# Altium PCB Serializer_System2.PcbDoc
Units mil, origin at the board's own origin, x right, y up, seen from the top; angles counter-clockwise.
Board outline 669.29 x 728.35 mil, 4 copper layers (Top Layer, MidLayer1, MidLayer2, Bottom Layer), stack 30.2 mil thick; 64 components, 46 nets, 233 pads, 76 vias.
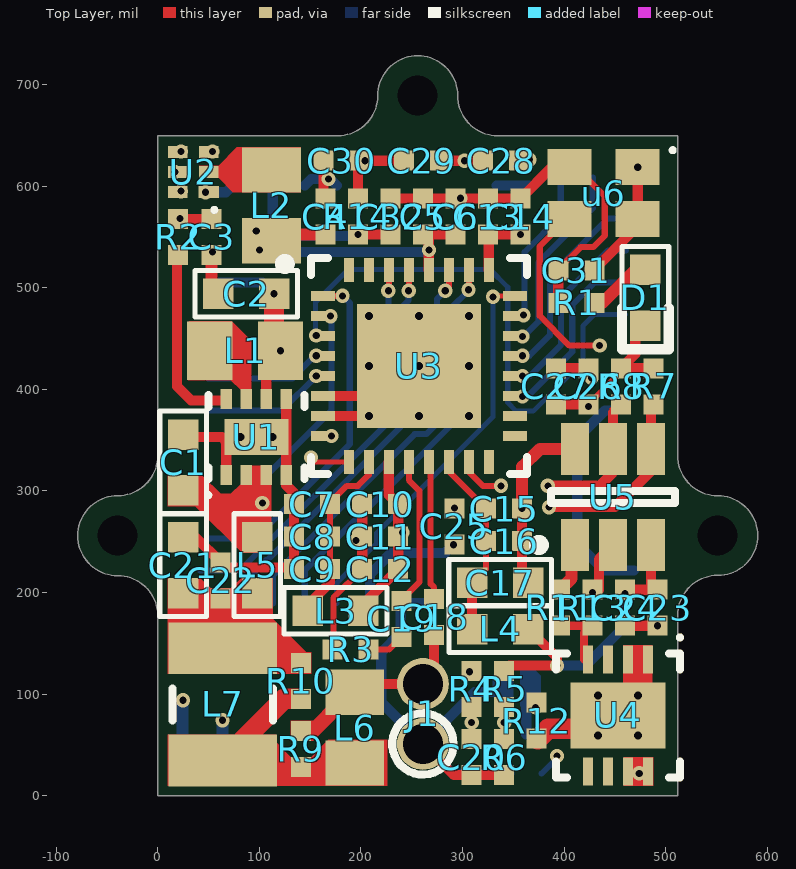
[diagram p0: Top Layer view]
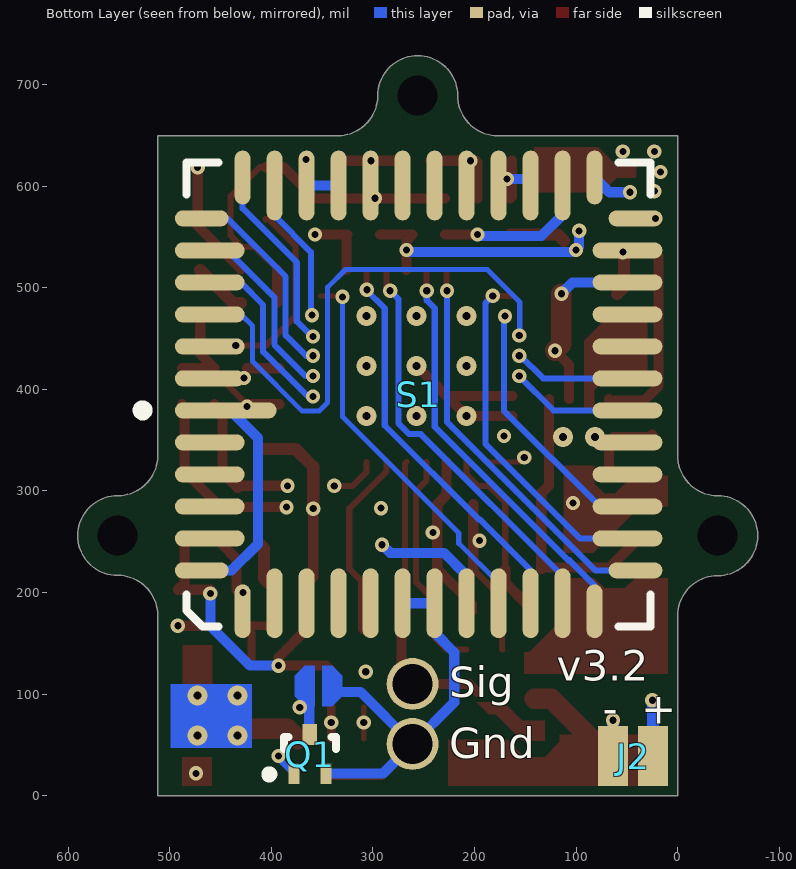
[diagram p1: Bottom Layer view, seen from below]
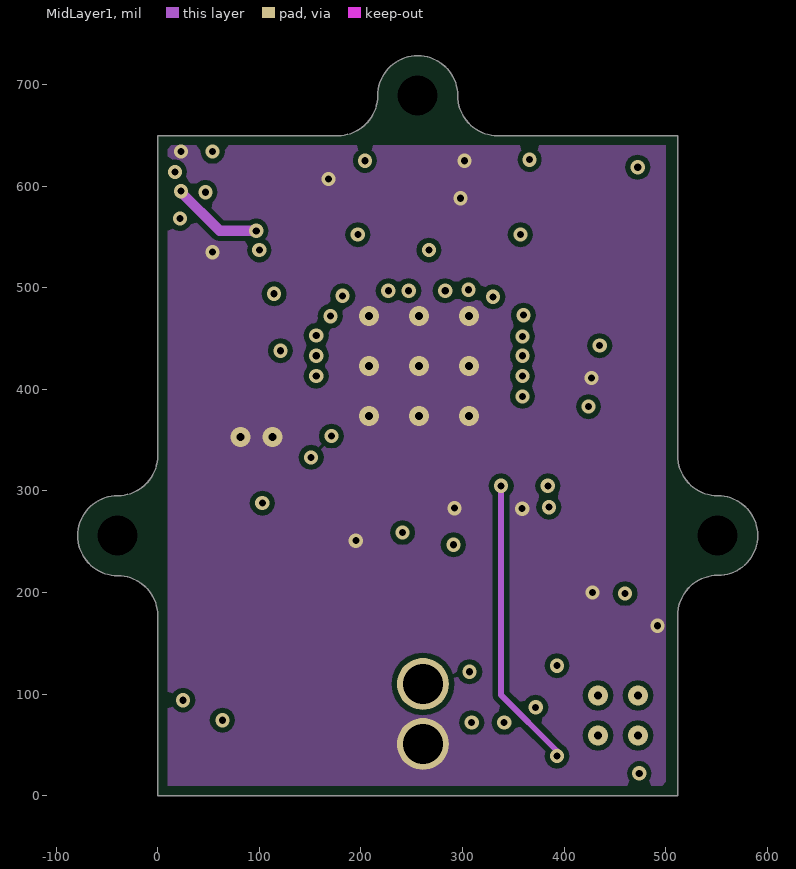
[diagram p2: MidLayer1]
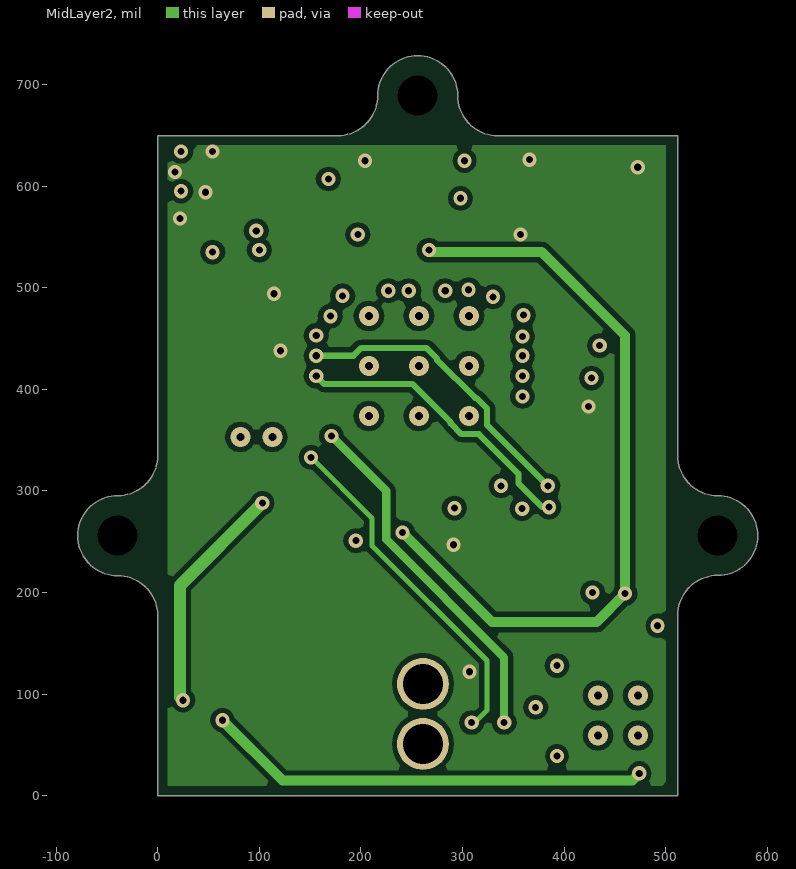
[diagram p3: MidLayer2]

## Layer stack, top to bottom
Top Solder: solder mask 0.4, Solder Resist, Dk 3.5
Top Layer: signal copper 1.4
Dielectric1: core 6, FR-4 High TG, Dk 4.8
MidLayer1: signal copper 1.4
Dielectric2: prepreg 12.6, FR-4 High TG, Dk 4.8
MidLayer2: signal copper 1.4
Dielectric3: core 6, FR-4 High TG, Dk 4.8
Bottom Layer: signal copper 1.4
Bottom Solder: solder mask 0.4, Solder Resist, Dk 3.5

## Board outline
0,0 511.81,0 511.81,177.17 511.81,177.51 cw(c551.18,177.51) 551.18,216.87 551.52,216.87 ccw(c551.52,255.91) 590.55,255.91 ccw(c551.18,255.91) 551.18,295.28 cw(c551.18,334.65) 511.81,334.65 511.81,649.61 334.65,649.61 cw(c334.65,688.98) 295.28,688.98 ccw(c255.91,688.98) 255.91,728.35 ccw(c255.91,688.98) 216.54,688.98 cw(c177.17,688.98) 177.17,649.61 0,649.61 cw(c-39.37,334.65) -39.37,295.28 ccw(c-39.37,255.91) -78.74,255.91 ccw(c-39.37,255.91) -39.37,216.54 cw(c-39.37,177.17) 0,177.17

## Design rules (kind name [scope] priority, off if disabled: settings)
Clearance [All] p1: gap=5
PolygonConnect [All] p1: connectstyle=Direct reliefconductorwidth=10 reliefentries=4 polygonreliefangle="90 Angle" airgapwidth=10
RoutingVias [All] p1: holewidth=10 width=22 viastyle="Through Hole" minholewidth=7 minwidth=14 maxholewidth=28 maxwidth=50
SolderMaskExpansion [All] p1: expansion=1
UnpouredPolygon [All] p1: allowunpoured=FALSE
Width [All] p1: maxlimit=100 minlimit=5 preferedwidth=10 minimp=50.000000 maximp=50.000000 favimp=50.000000
29 further rules are at their usual default settings.

## Classes and differential pairs
component class Connector: J2
net class DIN[0..11]: DIN0 DIN1 DIN2 DIN3 DIN4 DIN5 DIN6 DIN7 DIN8 DIN9 DIN10 DIN11
component class Serializer: C5 C6 C7 C8 C9 C10 C11 C12 C13 C14 C15 C16 C17 C18 C19 C20 L3 L4 R3 R4 R5 R6 R7 R8 U3
component class Power: C1 C2 C3 C4 D1 L1 L2 R1 R2 U1 U2
component class "LED Driver": C23 C24 Q1 R11 R12 R13 U4 U5
component class "Coax Port": C21 C22 J1 L5 L6 L7 R9 R10
component class "CMOS Sensor": C23 C24 C25 C26 C27 C30 R14 S1 u6

## Components (designator, comment, footprint, x,y, rotation, side; value= is the part's Value field where it differs from the comment)
C1 "10uF" "SMD Capacitor 0603" 25,328 r90 top
C2 "22uF" "SMD Capacitor 0603" 87,494 r180 top
C3 "2.2uF" "SMD CAP 0402" 53,550 r270 top
C4 "4.7uF" "SMD CAP 0402" 165,570 r90 top
C5 "0.1uF" "SMD CAP 0402" 261,570 r90 top
C6 "0.01uF" "SMD CAP 0402" 293,570 r90 top
C7 "0.1uF" "SMD CAP 0402" 152,287 r180 top
C8 "0.01uF" "SMD CAP 0402" 152,255 r180 top
C9 "4.7uF" "SMD CAP 0402" 152,223 r180 top
C10 "0.1uF" "SMD CAP 0402" 219,287 r180 top
C11 "0.01uF" "SMD CAP 0402" 219,255 r180 top
C12 "4.7uF" "SMD CAP 0402" 219,223 r180 top
C13 "0.1uF" "SMD CAP 0402" 325,570 r90 top
C14 "0.01uF" "SMD CAP 0402" 357,570 r90 top
C15 "0.1uF" "SMD CAP 0402" 340.98,282.54 r0 top
C16 "0.01uF" "SMD CAP 0402" 340.98,250.54 r0 top
C17 "22uF" "SMD Capacitor 0603" 336.98,209.54 r0 top
C18 "0.1uF" "SMD CAP 0402" 272,176 r270 top
C19 "0.047uF" "SMD CAP 0402" 240,174 r270 top
C20 "10uF" "SMD CAP 0402" 309,38 r270 top
C21 "4.7uF" "SMD Capacitor 0603" 25,227 r90 top
C22 ".1uF" "SMD CAP 0402" 62,212 r90 top
C23 "100nF" "SMD CAP 0402" 492,185 r270 top
C24 "1uF" "SMD CAP 0402" 460,185 r270 top
C25 "100nF" "SMD CAP 0402" 292,265 r90 top
C26 "100nF" "SMD CAP 0402" 424,403 r90 top
C27 "4.7uF" "SMD CAP 0402" 392,403 r90 top
C28 "100nF" "SMD CAP 0402" 338,625 r180 top
C29 "4.7uF" "SMD CAP 0402" 260,625 r0 top
C30 "100nF" "SMD CAP 0402" 181,625 r180 top
C31 "10nF" "SMD CAP 0402" 412,517 r180 top
C32 "100nF" "SMD CAP 0402" 229,570 r90 top
D1 "LED 0603" LED_0603 480,490 r90 top
J1 "Coax Connector" "Coax Direct Solder ThroughHoles" 261,110 r0 top
J2 "2 Pin Connector" "2pin smd pad for LED connector" 44,39 r0 bottom
L1 "Ferrite Bead" LQM21PN2R2MC0D 86,438 r0 top
L2 "Ferrite Bead" LQM21PN2R2MC0D 112,581 r270 top
L3 "Ferrite Bead" BLM18KG601SN1D 175,182 r180 top
L4 "Ferrite Bead" BLM18KG601SN1D 337,164 r0 top
L5 "Ferrite Bead" BLM18KG601SN1D 98,227 r90 top
L6 "Ferrite Bead" CIG21L4R7MNE 194,67 r270 top
L7 "Ferrite Bead" CBC3225T101MR 64,90 r90 top
Q1 "N Channel MOSFET" NTK3134N 362,41 r90 bottom
R1 "500" "SMD RES 0402" 412,485 r180 top
R2 "100k" "SMD RES 0402" 20,550 r90 top
R3 "49.9" "SMD RES 0402" 190,144 r180 top
R4 "10k" "SMD RES 0402" 309,105 r270 top
R5 "10k" "SMD RES 0402" 341,105 r90 top
R6 "100k" "SMD RES 0402" 341,38 r90 top
R7 "3.3k" "SMD RES 0402" 488,403 r90 top
R8 "3.3k" "SMD RES 0402" 456,403 r90 top
R9 "1k" "SMD RES 0402" 141,46 r270 top
R10 "1k" "SMD RES 0402" 141,113 r90 top
R11 "1k" "SMD RES 0402" 396,185 r270 top
R12 "10" "SMD RES 0402" 373,74 r90 top
R13 "1.25k" "SMD RES 0402" 428,185 r270 top
R14 "10k" "SMD RES 0402" 197,570 r90 top
S1 "CMOS Sensor MT9V032" "CMOS Sensor MT9V032_HD" 255,395 r90 bottom
U1 "TPS62172DSGT" DSG8-1600X900TP 97,353 r90 top
U2 "TPS62231DRYT" DRY6 35,614 r180 top
U3 "DS90UR913A" "WQFN32 for DS90UB913A" 257,423 r0 top
U4 "LT3092EDD#PBF" LT-DD-8_V 453,79 r270 top
U5 "DAC5571IDBVR" TI-DBV6_M 448,294 r90 top
u6 "OSC_26MHz_EPSON" "OSC SG_211SCE 26MHz" 439,593 r270 top

## Footprints (in the part's own frame and the unit in brackets; to place one, negate y for a bottom-side part, rotate by r counter-clockwise, add the part's x,y. Pads: shape width x height; smd on the part's side, far side on the other; paste and mask are expansions set on the pad)
"2pin smd pad for LED connector" [mm] "1mm pitch"
  rect 0.75x1.5 smd mask+0: 1(-0.5,0) 2(0.5,0)
BLM18KG601SN1D [mil] "0603 Ferrite Chip 600OHM 1.3A"
  rect 30x30 smd: 1(-27.5,0) 2(27.5,0)
  silkscreen extent -50,-23 50,23, body extent -32,-15 32,15, height 19
CBC3225T101MR [mm] "Chip Inductor, 2-Leads, Body 3.20x2.50mm, IPC Medium Density, 100uH, 340mA, 1.82OHM"
  rect 1.29x2.72 smd: 1(-1.405,0) 2(1.405,0)
  silkscreen extent -0.4,-1.26 0.4,1.26, body extent -1.7,-1.35 1.7,1.35, height 2.7
CIG21L4R7MNE [mm] "SMD 0805 4.7uH, 750mA"
  rect 1.13x1.47 smd: 1(-0.885,0) 2(0.885,0)
  body extent -1.1,-0.72 1.1,0.72, height 1.05
"CMOS Sensor MT9V032_HD" [mm] "LCC, 48-Pins, Body 11.43x11.43mmx2.50mm, Pitch 0.80mm, IPC High Density"
  oval 0.4x2.546 smd: 1(-0.4,4.823)
  oval 0.4x1.746 smd: 2(-1.2,5.223) 3(-2,5.223) 4(-2.8,5.223) 5(-3.6,5.223) 20(-3.6,-5.223) 21(-2.8,-5.223) 22(-2,-5.223) 23(-1.2,-5.223) 24(-0.4,-5.223) 25(0.4,-5.223) 26(1.2,-5.223) 27(2,-5.223) 28(2.8,-5.223) 29(3.6,-5.223) 44(3.6,5.223) 45(2.8,5.223) 46(2,5.223) 47(1.2,5.223) 48(0.4,5.223)
  oval 0.4x1.346 smd: 6(-4.4,5.423) 19(-4.4,-5.423) 30(4.4,-5.423) 43(4.4,5.423)
  oval 1.346x0.4 smd: 7(-5.423,4.4) 18(-5.423,-4.4) 31(5.423,-4.4) 42(5.423,4.4)
  oval 1.746x0.4 smd: 8(-5.223,3.6) 9(-5.223,2.8) 10(-5.223,2) 11(-5.223,1.2) 12(-5.223,0.4) 13(-5.223,-0.4) 14(-5.223,-1.2) 15(-5.223,-2) 16(-5.223,-2.8) 17(-5.223,-3.6) 32(5.223,-3.6) 33(5.223,-2.8) 34(5.223,-2) 35(5.223,-1.2) 36(5.223,-0.4) 37(5.223,0.4) 38(5.223,1.2) 39(5.223,2) 40(5.223,2.8) 41(5.223,3.6)
  silkscreen extent -5.8,-5.8 5.8,7.02, body extent -5.71,-5.71 5.71,5.71, height 2.5
"Coax Direct Solder ThroughHoles" [mm]
  round 1.3 hole 1 mask+0: 0(0,0) 1(0,-1.5)
DRY6 [mm] "PSON, 6-Leads, Body 1x1.45mm, Pitch 0.5mm, TI Recommended"
  rect 0.52x0.3 smd paste+0 mask+0.05: 1(-0.385,0.5)
  rect 0.49x0.3 smd paste+0 mask+0.05: 2(-0.385,0) 3(-0.385,-0.5) 4(0.385,-0.5) 5(0.385,0) 6(0.385,0.5)
  silkscreen extent -0.58,0.9 -0.48,1, body extent -0.53,-0.75 0.53,0.75, height 0.6
DSG8-1600X900TP [mm] "SON, 8-Leads, Body 2x2mm, Pitch 0.5mm, Thermal Pad 1.6x0.9mm, TI Recommended"
  rect 0.5x0.28 smd paste-0.14 mask+0.07: 1(-0.95,0.75) 2(-0.95,0.25) 3(-0.95,-0.25) 4(-0.95,-0.75) 5(0.95,-0.75) 6(0.95,-0.25) 7(0.95,0.25) 8(0.95,0.75)
  rect 0.9x1.6 smd paste-0.45 mask+0.07: 9(0,0)
  silkscreen extent -1.5,-1.2 1.05,1.25, body extent -1.05,-1.05 1.05,1.05, height 0.8
LED_0603 [mil] "LTST-C190KGKT"
  rect 30x30 smd: A(-27.5,0) C(27.5,0)
  silkscreen extent -50,-23 50,23, body extent -32,-15 32,15, height 20
LQM21PN2R2MC0D [mm] "SMD Fixed Ind. 2.2uH, 600mA, 0805"
  rect 1.13x1.47 smd: 1(-0.885,0) 2(0.885,0)
  body extent -1.1,-0.72 1.1,0.72, height 1.05
LT-DD-8_V [mm] "SON, 8-Leads, Body 3x3mm, Pitch 0.5mm, Thermal Pad 1.65x2.38 mm, IPC Low Density"
  rect 0.7x0.25 smd mask+0.102: 1(-1.4,0.75) 2(-1.4,0.25) 3(-1.4,-0.25) 4(-1.4,-0.75) 5(1.4,-0.75) 6(1.4,-0.25) 7(1.4,0.25) 8(1.4,0.75)
  rect 1.65x2.38 smd mask+0.102: 9(0,0)
  silkscreen extent -2,-1.55 1.55,1.6, body extent -1.5,-1.5 1.5,1.5, height 0.8
NTK3134N [mm] "SOT723, 3-Leads, Body 1.20x1.20mm, Pitch 0.40mm, IPC Medium Density"
  rect 0.52x0.36 smd: D(0.49,0)
  rect 0.52x0.27 smd: G(-0.49,0.4) S(-0.49,-0.4)
  silkscreen extent -0.61,-0.65 0.43,1.12, body extent -0.42,-0.63 0.43,0.63, height 0.55
"OSC SG_211SCE 26MHz" [mm] "DFN, 4-Leads, Body 2.50x2.00mm, Pitch 1.70mm, IPC Medium Density"
  rect 0.9x1.1 smd: 1(-0.65,0.85) 2(-0.65,-0.85) 3(0.65,-0.85) 4(0.65,0.85)
  silkscreen extent -1.12,1.68 -1.03,1.77, body extent -1.07,-1.33 1.08,1.32, height 0.8
"SMD CAP 0402" [mm] "Chip Capacitor, 2-Leads, Body 1.00x0.50mm, IPC Medium Density"
  rect 0.5x0.5 smd: 0(-0.45,0) 1(0.45,0)
  body extent -0.53,-0.28 0.53,0.28, height 0.5
"SMD Capacitor 0603" [mil]
  rect 30x30 smd: 0(-27.5,0) 1(27.5,0)
  silkscreen extent -50,-23 50,23, body extent -32,-15 32,15, height 19
"SMD RES 0402" [mm]
  rect 0.5x0.5 smd: 0(-0.45,0) 1(0.45,0)
  body extent -0.53,-0.28 0.53,0.28, height 0.5
TI-DBV6_M [mm] "SOT23, 6-Leads, Body 2.9x1.6mm, Pitch 0.95mm, IPC Low Density"
  rect 1.3x0.7 smd: 1(-1.2,0.95) 2(-1.2,0) 3(-1.2,-0.95) 4(1.2,-0.95) 5(1.2,0) 6(1.2,0.95)
  silkscreen extent -1.32,-1.55 0.15,1.97, body extent -0.87,-1.52 0.87,1.53, height 1.45
"WQFN32 for DS90UB913A" [mm] "QFN, 32-Leads, Body 5.00x5.00mm, Pitch 0.50mm, Thermal Pad 3.10x3.10mm, IPC Medium Density"
  rect 0.6x0.25 smd mask+0: 1(-2.4,1.75) 2(-2.4,1.25) 3(-2.4,0.75) 4(-2.4,0.25) 5(-2.4,-0.25) 6(-2.4,-0.75) 7(-2.4,-1.25) 8(-2.4,-1.75) 17(2.4,-1.75) 18(2.4,-1.25) 19(2.4,-0.75) 20(2.4,-0.25) 21(2.4,0.25) 22(2.4,0.75) 23(2.4,1.25) 24(2.4,1.75)
  rect 0.25x0.6 smd mask+0: 9(-1.75,-2.4) 10(-1.25,-2.4) 11(-0.75,-2.4) 12(-0.25,-2.4) 13(0.25,-2.4) 14(0.75,-2.4) 15(1.25,-2.4) 16(1.75,-2.4) 25(1.75,2.4) 26(1.25,2.4) 27(0.75,2.4) 28(0.25,2.4) 29(-0.25,2.4) 30(-0.75,2.4) 31(-1.25,2.4) 32(-1.75,2.4)
  rect 3.1x3.1 smd paste-4: 33(0,0)
  silkscreen extent -3.47,-2.7 2.7,2.7, body extent -2.55,-2.55 2.55,2.55, height 0.8

## Part data
C1 C2 C3 C4 C5 C6 C7 C8 C9 C10 C11 C12 C13 C14 C15 C16 C17 C18 C19 C20 C21 C22 C23 C24 C25 C26 C27 C28 C29 C30 C31 C32: library part Capacitor
D1: "LTST_C195TBJRKT"
R1 R2 R3 R4 R5 R6 R7 R8 R9 R10 R11 R12 R13 R14: library part Resistor
U1: library part TPS62170DSGT, "Buck Step Down Regulator with 3 to 17 V Input and 0.9 to 6 V Output, -40 to 85 degC, 8-Pin WSON (DSG), Green (RoHS & no Sb/Br)"
U2: "Buck Step Down Regulator with 2.05 to 6 V Input and 1.8 V Output, -40 to 85 degC, 6-Pin SON (DRY), Green (RoHS & no Sb/Br)"
U3: "DS90UR913ASERIALIZER"
U4: "200 mA Two-Terminal Programmable Current Source, 0.3 mA Isupply, 8-pin SON (DD-8), -40 to 125 degC, Pb-Free"
U5: "Low-Power, 8-Bit DAC with High-Speed I2C Input, -40 to 105 degC, 6-pin SOT23 (DBV6), Green (RoHS & no Sb/Br)"

## Free pads (board coordinates)
  round 0 hole 39.37 unplated: NA(-39.37,255.91) NA(255.91,688.98) NA(551.18,255.91)

## Via types
v1: diameter 14, hole 7, Top Layer to Bottom Layer, tented both sides, 61 vias
v2: diameter 19.68, hole 7.87, Top Layer to Bottom Layer, tented both sides, 11 vias
v3: diameter 19.68, hole 7.87, Top Layer to Bottom Layer, 4 vias

## Nets (pads, with @x,y where several pads share a name; then routed paths per layer and width w, separated by ;. In a path a pad name is that pad's centre, name@x,y a point inside that pad or via, vN(x,y) a via of type N, cw(c..) or ccw(c..) an arc to the next point about the centre after c; other vN are vias at no path point)
DIN0: S1.45 U3.19 | length 175.1
  Bottom Layer w6: v1(359,393) 364,393 408,437 408,483 430.24,505.24 S1.45
DIN1: S1.44 U3.20 | length 180.2
  Bottom Layer w6: v1(359,413) 366,413 397,444 397,490.55 443.18,536.73 S1.44
DIN2: S1.43 U3.21 | length 199.4
  Bottom Layer w6: v1(359,433) 365.77,433 386,453.23 386,511.05 443.18,568.23 S1.43
DIN3: S1.42 U3.22 | length 185.9
  Bottom Layer w6: v1(359,452) 360.21,452 375,466.79 375,525 428.23,578.23 S1.42
DIN4: S1.41 U3.23 | length 143.4
  Bottom Layer w6: v1(360,473) 361,473 361,535.07 396.73,570.8 S1.41
DIN5: S1.15 U3.24 | length 387.2
  Top Layer w5: v1(330,491) 330.9,491.9 U3.24
  Bottom Layer w5: S1.15 176.26,209.26 215.5,248.5 215.5,258.5 330,373 v1(330,491)
DIN6: S1.16 U3.26 | length 395.7
  Top Layer w6: v1(306,498) 306.21,498.21 U3.26
  Bottom Layer w6: S1.16 144.76,221.98 194.79,272 196,272 288.37,364.37 288.37,479.6 306,497.23 v1(306,498)
DIN7: S1.17 U3.27 | length 407.8
  Top Layer w6: v1(283,497) 285.06,497 286.53,498.47 U3.27
  Bottom Layer w6: S1.17 113.27,216.27 252.94,355.94 264.39,355.94 275,366.55 275,489 v1(283,497)
DIN8: S1.18 U3.29 | length 405.1
  Top Layer w6: v1(247,497) 247.16,497.16 U3.29
  Bottom Layer w6: S1.18 81.77,206.82 106.69,231.74 107.74,231.74 239.16,363.16 239.16,479.6 247,487.45 v1(247,497)
DIN9: S1.19 U3.30 | length 395.9
  Top Layer w6: v1(227,497) 227.47,497.47 U3.30
  Bottom Layer w6: S1.19 81,221.77 227,367.77 v1(227,497)
DIN10: U3.31
DIN11: U3.32
GND: C1.1 C2.1 C3.1 C4.1 C5.1 C6.1 C7.1 C8.1 C9.1 C10.1 C11.1 C12.1 C13.1 C14.1 C15.1 C16.1 C17.1 C20.1 C21.1 C22.1 C23.1 C24.1 C25.1 C26.1 C27.1 C28.1 C29.1 C30.1 C31.1 C32.1 J1.1 Q1.S R1.1 R3.1 R6.0 R13.0 S1.7 S1.12 S1.13 S1.23 S1.29 S1.33 S1.34 S1.38 S1.48 U1.1 U1.4 U1.5 U1.9 U2.4 U3.6 U3.7 U3.33 U5.2 U5.6 u6.2 | length 2012.9
  Top Layer w6: R3.1 173,144.72 173,194.72 C12.1 ; C31.1@394.28,518 416.28,540 428.81,540 440,551.19 440,590 411.41,618.59 u6.2
  Top Layer w10: C21.1 37.22,254.5 C22.1 67.22,224.5 C9.1@134.28,224.5 ; C1.1 27.5,353 63,353 67.47,348.53 U1.1 ; U1.5 U1.4 126.53,305.47 134.28,297.72 C7.1 C8.1 C9.1@134.28,224.5 ; C9.1 C9.1@134.28,224.5 ; U3.7 v2(207.79,373.79) U3.33@227.47,393.47 ; U3.6 U3.33@227.47,393.47 ; C30.1 163.28,589.43 C4.1 ; C12.1 C11.1 C10.1 ; C32.1 C5.1 C6.1 C13.1 C14.1 387.87,618.59 u6.2 ; v2(257,423) U3.33@227.47,393.47 ; J1.1 291.66,20.28 C20.1 R6.0 ; C29.1@279.72,625 C28.1@324.28,625 ; v1(358.69,282.54) C16.1 358.69,215.33 C17.1 ; C27.1 C26.1 ; R1.1 C31.1@394.28,518 ; R13.0 434.38,202.72 434.38,233.13 U5.2 ; C24.1 v1(492,167.28)
  Top Layer w12: C3.1 53,500.5 C2.1 ; v1(358.69,282.54) 358.69,323.69 376.24,341.24 U5.6
  Bottom Layer w10: S1.33 151.13,607 v1(168,607) 169.89,607 S1.34 ; S1.12 S1.13 239.25,160.25 220,141 220,91.94 J1.1 ; 339,102 312.06,102 J1.1 ; Q1.S 290.24,21.71 J1.1
  Bottom Layer w12: v1@491.72,167 v1(492,167.28)
  other v1: 428,200 195,251 292,283 427,411 54,535 298,588 302,625 23,634
  other v2: 81.25,353 112.75,353 257,373.79 306.21,373.79 207.79,423 306.21,423 207.79,472.21 257,472.21 306.21,472.21
NetC7_0: C7.0 C8.0 C9.0 L3.2 U3.10 | length 177.9
  Top Layer w6: C9.0 C8.0 C7.0 169.72,288.72 186,305 197,305 207.79,315.79 U3.10
  Top Layer w10: L3.2 147.5,187.6 169.72,209.82 C9.0
NetC15_0: C15.0 C16.0 C17.0 L4.1 U3.14 | length 185.4
  Top Layer w6: U3.14 286.53,319.28 C15.0 C16.0 323.26,223.33 C17.0
  Top Layer w10: L4.1 C17.0
NetC18_0: C18.0 U3.13 | length 136.9
  Top Layer w6: U3.13 268.56,326.8 268.56,208.44 272,205 C18.0
NetC18_1: C18.1 J1.0 L6.1 R9.0 | length 120.1
  Top Layer w10: L6.1@197,102.15 204.85,110 J1.0 272,121 C18.1
NetC19_0: C19.0 U3.12 | length 148.4
  Top Layer w6: C19.0 240,192.72 257.56,210.27 257.56,300.16 247.16,310.56 U3.12
NetC19_1: C19.1 R3.0 | length 37.4
  Top Layer w6: R3.0 227.72,144 C19.1
NetC20_0: C20.0 R4.1 U3.9 | length 411.2
  Top Layer w5: v1(151,333) 155.49,328.51 U3.9 ; C20.0 v1(309,72) R4.1
  MidLayer2 w5: v1(151,333) 211,273 211,246 324,133 324,84 312,72 v1(309,72)
NetC21_0: C21.0 C22.0 L5.1 L7.2 R10.1
NetC32_0: C32.0 R14.0 S1.32 | length 153.7
  Top Layer w10: v1(197,552.28) C32.0
  Bottom Layer w10: S1.32 113.27,571.73 134,551 195.72,551 v1(197,552.28)
NetD1_C: D1.C R1.0 | length 53.7
  Top Layer w12: R1.0 437.5,485 D1.C@470,517.5
NetJ2_2: J2.2 U4.7 U4.8 | length 473.1
  MidLayer2 w10: v1(63.68,74.32) 123,15 467,15 v1(474,22)
  Bottom Layer w12: J2.2 v1(63.68,74.32)
NetL1_1: L1.1 U1.7
NetL2_1: L2.1 U2.2
NetL6_2: L6.2 L7.1 R9.1 R10.0 | length 102.1
  Top Layer w20: L7.1 124.6,95.28 R10.0
NetQ1_D: Q1.D R12.1 | length 51.4
  Bottom Layer w10: Q1.D@362.71,60.29 362.71,92 ; 362.71,100.29 362.71,92 ; v1(372,87) 367.71,87 362.71,92
NetQ1_G: Q1.G U3.15 | length 359.6
  Top Layer w6: U3.15 306.21,318.79 320,305 v1(338,305)
  MidLayer1 w6: v1(338,305) 338,99 393,44 v1(393,39)
  Bottom Layer w6: Q1.G 393,36.96 v1(393,39)
NetR2_0: R2.0 U1.8 | length 185.4
  Top Layer w10: R2.0 18.91,531.2 18.91,403.09 33,389 67.47,389 U1.8
NetR5_0: R5.0 R6.1 U3.8 | length 384
  Top Layer w8: R6.1 v1(341,72) R5.0
  MidLayer2 w8: v1(171,354) 225,300 225,252 341,136 v1(341,72)
NetR7_0: R7.0 S1.24 U3.5 U5.4 | length 591.4
  Top Layer w10: v1(385,284) 450,284 485.4,319.4 U5.4 485.4,382.68 R7.0
  MidLayer2 w6: v1(156,413) 163.84,405.16 250.86,405.16 288.37,367.65 288.37,366.4 298.82,355.94 316.06,355.94 355,317 355,307.45 378.45,284 v1(385,284)
  Bottom Layer w6: S1.24 122.25,379.25 v1(156,413)
NetR8_0: R8.0 S1.25 U3.4 U5.5 | length 555.2
  Top Layer w10: v1(384,305) 431,305 433,303 448,318 U5.5 448,377.28 R8.0
  MidLayer2 w6: v1(156,433) 192.55,433 200.4,440.84 264.39,440.84 274.84,430.39 274.84,429.14 312.35,391.63 313.6,391.63 324.06,381.18 324.06,364.94 v1(384,305)
  Bottom Layer w6: S1.25 132.53,410.75 154.79,433 v1(156,433)
NetR11_0: R11.0 U5.1 | length 50.1
  Top Layer w12: R11.0 407.16,213.87 407.16,243.32 U5.1
NetR11_1: R11.1 R13.1 U4.4 | length 70
  Top Layer w8: R11.1 R13.1 ccw(c428,158.76) 419.47,158.76 U4.4@419.47,134.12
NetR12_0: R12.0 U4.1 U4.2 U4.9 | length 94.2
  Top Layer w20: R12.0@374,55.72 384.28,66 426.63,66 v3(433.32,59.32) U4.9
  other v3: 472.69,59.32 433.32,98.68 472.69,98.68
NetS1_20: S1.20 U3.1 | length 346.5
  Top Layer w6: U3.1 181.9,491.9 v1(182,492)
  Bottom Layer w6: S1.20 96.27,253.27 189,346 189,485 v1(182,492)
NetS1_21: S1.21 U3.2 | length 254.1
  Bottom Layer w6: S1.21 76.76,284.76 171,379 171,471 v1(170,472)
NetS1_46: S1.46 U3.3 | length 535.8
  Bottom Layer w5: v1(156,453) 155.5,453.5 155.5,486.01 187.49,518 327,518 344.5,500.5 344.5,386.99 352.99,378.5 369.5,378.5 418.5,427.5 418.5,462.5 429.74,473.74 S1.46
NetU3_16: U3.16
NetU3_17: U3.17
NetU3_18: U3.18
SYSCLK: S1.47 u6.3 | length 180.2
  Top Layer w6: u6.3 402.69,567.41 376,540.72 376,472.28 405.28,443 v1(435,443)
V1P8: C4.0 C5.0 C6.0 C10.0 C11.0 C12.0 C23.0 C24.0 L2.2 L3.1 L4.2 R5.1 U2.6 U3.11 U3.28 U5.3 | length 1613.8
  Top Layer w10: L3.1 202.5,188.78 C12.0 C11.0 C10.0 227.47,296.24 U3.11 ; U3.28 266.84,546.44 C5.0 C6.0 ; R5.1 346.28,128 v1(393,128) 393,136 365,164 L4.2 ; C24.0 C23.0 485.4,209.32 U5.3
  Top Layer w12: L2.2 118.13,552.28 C4.0
  MidLayer1 w10: v1(23,595) 23,593.96 60.96,556 v1(97,556)
  MidLayer2 w10: v1(241,259) 329,171 432,171 v1(460,199) 460,453 377.72,535.28 268.72,535.28 v1(267,537)
  Bottom Layer w10: v1(97,556) 97,540 v1(100,537) 101.72,535.28 265.28,535.28 v1(267,537) ; v1(393,128) 421,128 460,167 v1(460,199)
V3P3: C2.0 C3.0 C13.0 C14.0 C25.0 C26.0 C27.0 C28.0 C29.0 C30.0 C31.0 D1.A L1.2 R2.1 R4.0 R7.1 R8.1 R14.1 S1.1 S1.6 S1.14 S1.28 S1.30 S1.31 S1.35 S1.39 S1.40 U1.6 U2.1 U2.3 U2.5 U3.25 u6.1 u6.4 | length 1052
  Top Layer w6: C26.0 456,417.28 R8.1
  Top Layer w8: C13.0 C13.0@325.9,551.39
  Top Layer w10: R2.1 C3.0 ; U1.6 106.84,424 v1(120.84,438) ; R14.1 197,623.28 C30.0 C29.0@243.28,625 ; C13.0 v1(357,552.28) ; U3.25 C13.0@325.9,551.39 ; C27.0 C26.0 ; C31.0@429.72,518 472.46,560.75 u6.4 v1(472.46,618.59) ; D1.A@470,462.5 470,434.72 R8.1 R7.1
  Top Layer w20: v1(114.5,494) 114.5,444.34 v1(120.84,438)
  Bottom Layer w10: v1(47,594) 67.27,594 S1.31 ; S1.28 103.26,505.24 v1(114.5,494) ; S1.14 209,190.61 209,218 230,239 283,239 v1(291,247) ; S1.39 S1.40 ; S1.1 440.35,379.25 413,351.9 413,248 439.23,221.77 S1.6
  other v1: 307,122 424,383 22,568 17,614 204,625 366,626 54,634
V5P0: C1.0 J2.1 L5.2 U1.2 U1.3 | length 284.1
  MidLayer2 w12: v1(25,94) 22,97 22,207 v1(103,288)
  Bottom Layer w12: J2.1 24.32,93.32 v1(25,94)
pads on no net: S1.2 S1.3 S1.4 S1.5 S1.8 S1.9 S1.10 S1.11 S1.22 S1.26 S1.27 S1.36 S1.37 U4.3 U4.5 U4.6

## Polygon pours and split planes (outlines as drawn)
GND on MidLayer1 "MidLayer1-Gnd" (solid, pour order 2): 10,10 500,10 500,640 10,640
V3P3 on MidLayer2 "MidLayer2-V3P3" (solid, remove dead copper, pour order 6): 10,10 500,10 500,640 10,640

## Other copper
Top Layer:
  region net NetL6_2: 226,55 226,10 10,10 10,60 116,60 116,53 131,38 151,38 168,55
  region net NetC18_1: 131,54 131,74 153,74 171,92 198,92 186,80 179,80 153,54
  region net NetC21_0: 10,120 10,214 42,214 52,204 72,204 82,214 113,214 113,174 146,141 151,141 151,120
  region net V5P0: 112,325 82,325 82,307 72,297 62,297 44,315 10,315 10,285 37,285 83,239 112,239
  region net NetL1_1: 30,409 72,409 82,399 82,381 92,381 92,448 73,467 31,467 30,466
  region net NetL2_1: 41,620 60,620 78,638 141,638 141,594 74,594 60,608 42,608 41,609
  region net NetR12_0: 458,148 487,148 487,106 459,106 458,105
  region net NetJ2_2: 458.5,38 487.5,38 487.5,10 458.5,10
Bottom Layer:
  rectangle net NetR12_0: 419,47 499,110
  region net NetQ1_D: 377,98 367,88 357,88 357,128 367,128 377,118
  region net GND: 330,118 340,128 350,128 350,88 340,88 330,98

## Silkscreen, mask and mechanical layers (free items; w line width, h text height)
Top Overlay:
  circle w8: c261,50.94 r30.21
Bottom Overlay:
  text "v3.2" at 119,113 h30
  text "Sig" at 225,97 h30
  text "+" at 36,71 h30
  text "-" at 74,71 h30
  text "Gnd" at 225,37 h30
Bottom Solder:
  rectangle: 349,88 359,128
M1 Board Outline:
  lines w0: 295.28,688.98 ccw(c334.65,688.98) 334.65,649.61 ; 295.96,688.3 295.96,688.98 ; 295.96,688.98 ccw(c255.91,688.98) 255.91,729.03 ccw(c255.91,688.98) 215.85,688.98 215.85,688.29 cw(c177.17,688.29) 177.17,649.61 0,649.61 0,334.99 ccw(c0.34,334.99) 0.34,334.65 cw(c-38.69,334.65) -38.69,295.62 -39.37,295.62 ccw(c-39.37,255.91) -79.08,255.91 -79.08,255.57 ccw(c-40.05,255.57) -40.05,216.53 -39.03,216.53 cw(c-39.03,177.5) 0,177.5 0,177.17 0,0 511.81,0 511.81,176.01 ccw(c510.65,176.01) 511.47,176.83 cw(c550.5,176.83) 550.5,215.86 550.84,215.86 ccw(c550.84,255.91) 590.89,255.91 ccw(c551.86,255.91) 551.86,294.94 551.18,294.94 cw(c551.18,334.3) 511.81,334.3 511.81,649.61 334.65,649.61 ; 295.96,688.98 295.96,688.98 ; 334.65,649.61 ccw(c334.65,649.61) 334.65,649.61 ; 334.65,649.6 ccw(c334.65,649.61) 334.65,649.61 ; 334.65,649.61 334.65,649.61 ; 334.65,649.6 334.65,649.61
M5 Assembly Top:
  circle w10: c56,591 r5
  circle w10: c66,315 r5
  circle w10: c408,246 r5
  circle w10: c483,130 r5
  circle w10: c160,500 r5
  circle w10: c485,626 r5
  lines w4: -24,312 64,309 ; -17,523 156,502 ; -12,590 61,591 ; 413,246 523,222 ; 488,130 519,134 ; 490,626 529,628
  text "u6_Pin1" at 537,628 h20
  text "U2_Pin1" at -145,584 h20
  text "U3_Pin1" at -146,516 h20
  text "U1_Pin1" at -156,308 h20
  text "U5_Pin1" at 535,207 h20
  text "U4_Pin1" at 528,124 h20
M6 Assembly Bottom:
  circle w10: c444.88,379.25 r5
  lines w4: 449.88,379.25 549,379
  text "S1_Pin1" at 558,370 h20
M17 Board Outline:
  lines w0: 0,0 511.81,0 511.81,649.61 0,649.61 0,0